# Altium PCB pcb.PcbDoc
Units mm, origin at the board's own origin, x right, y up, seen from the top; angles counter-clockwise.
Board outline 101 x 56 mm, 2 copper layers (Top Layer, Bottom Layer), stack 1.58 mm thick; 48 components, 39 nets, 217 pads, 0 vias.
Unrouted connection lines stored in the file: 108.
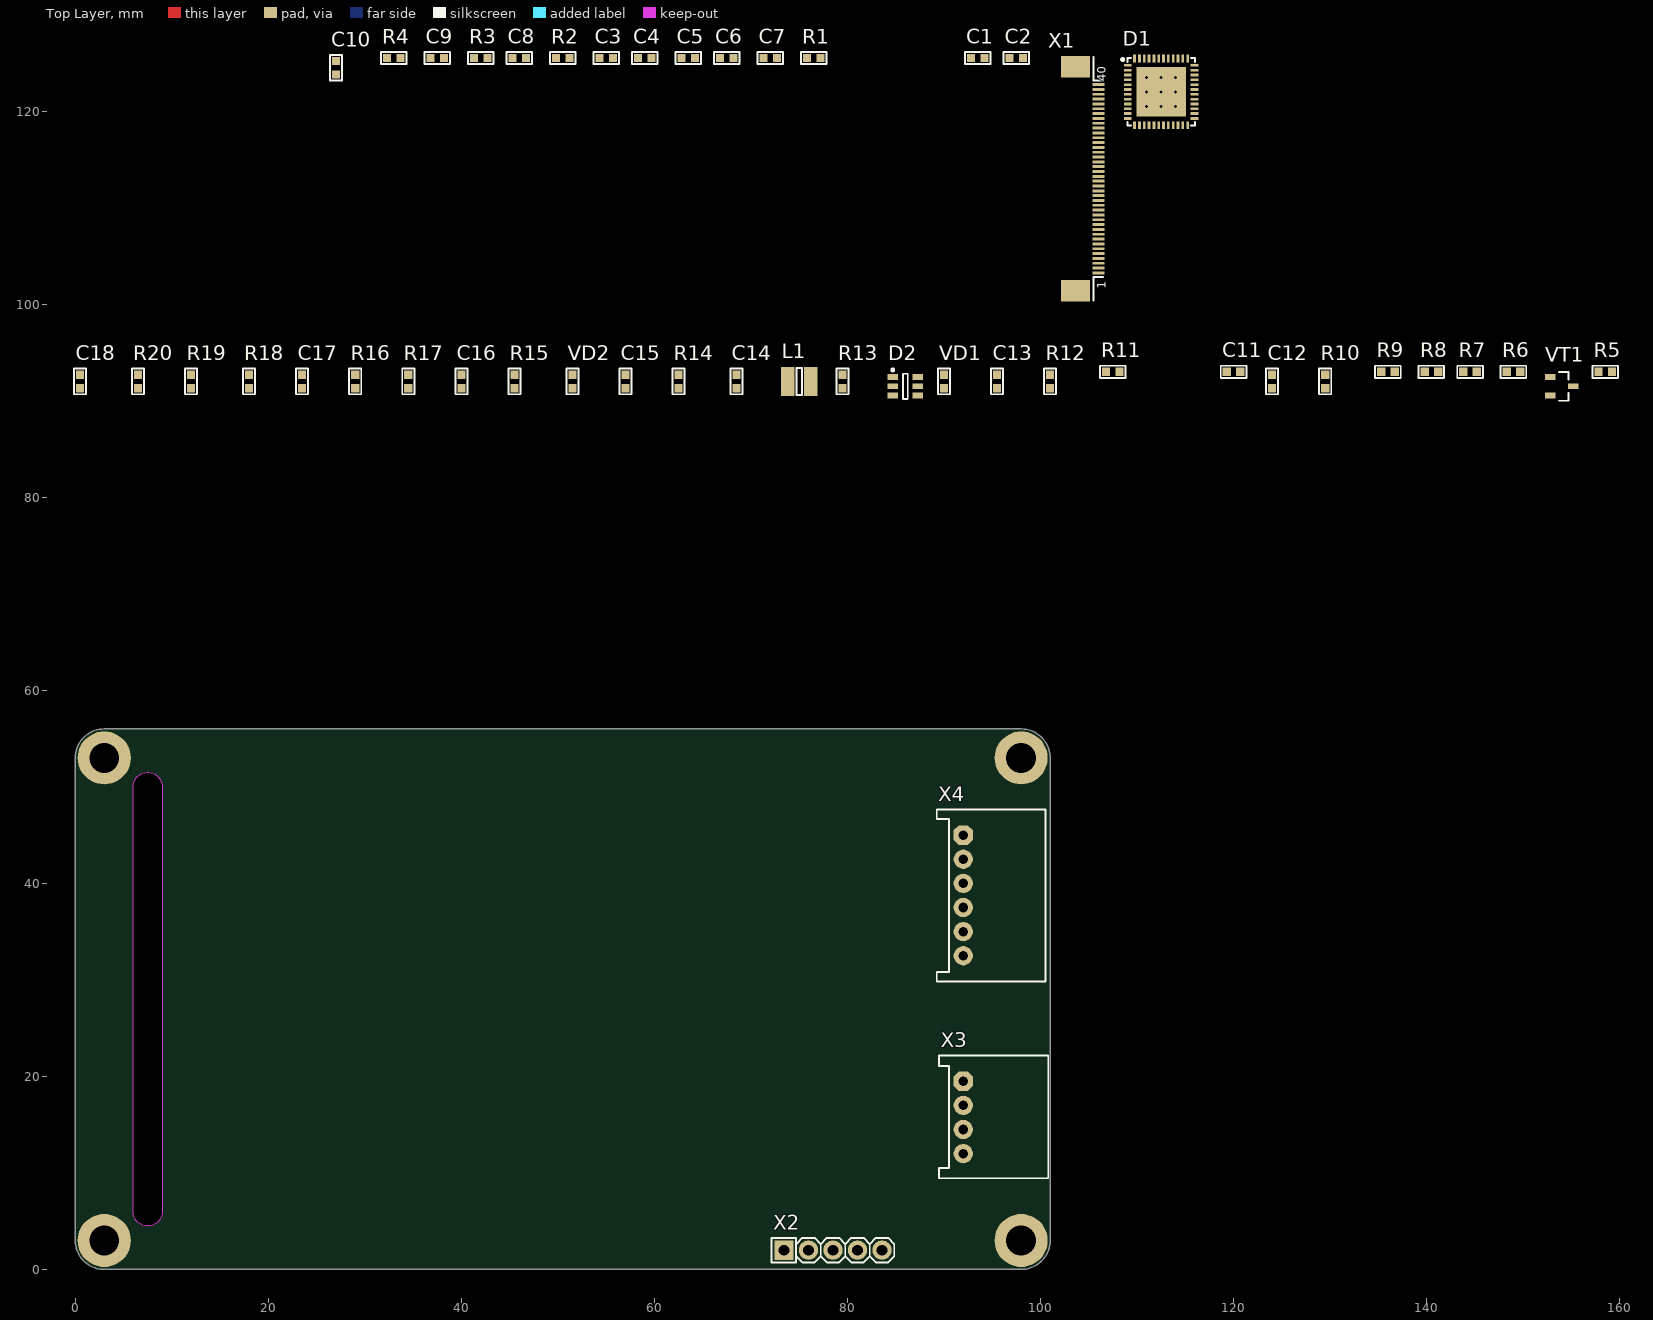
[diagram p0: Top Layer view]
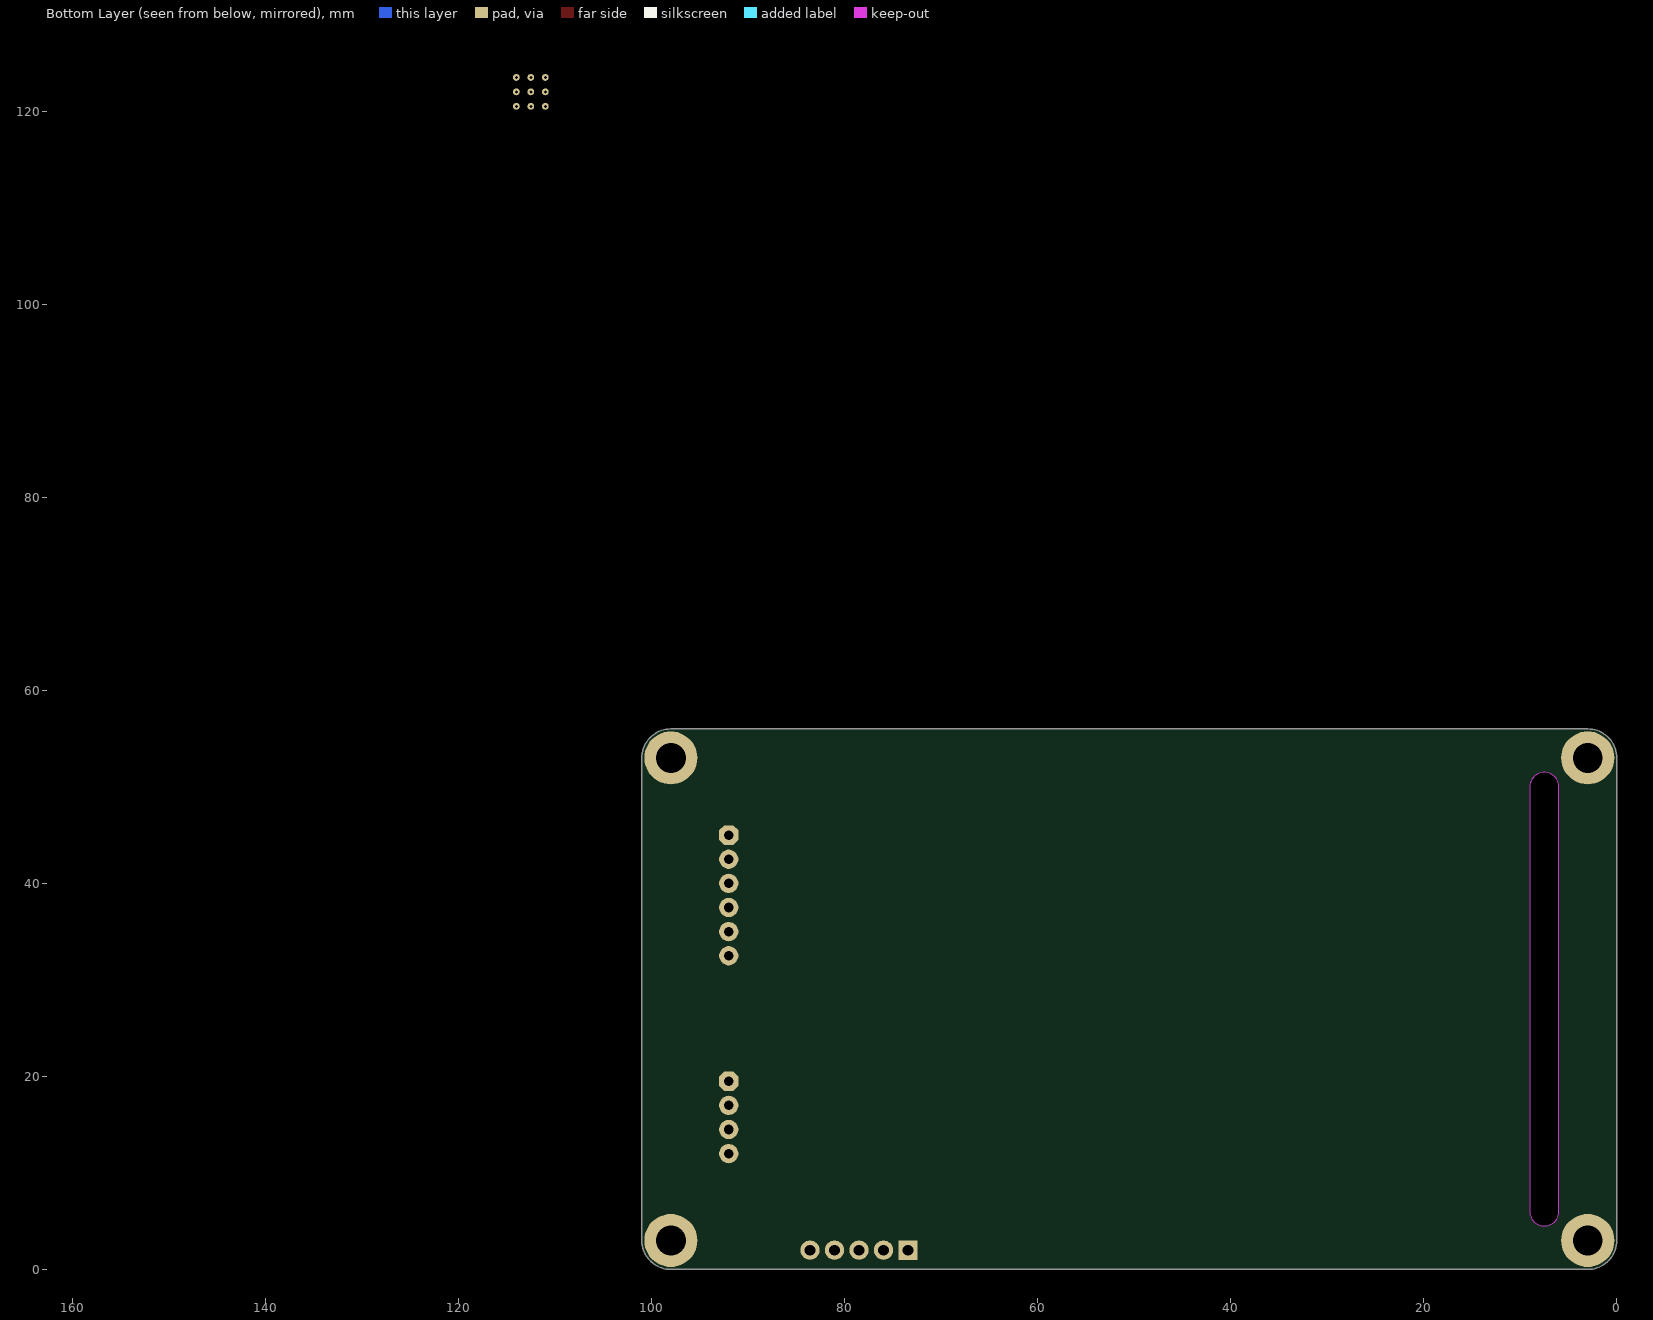
[diagram p1: Bottom Layer view, seen from below]

## Layer stack, top to bottom
Top Solder: solder mask 0.0102, Solder Resist, Dk 3.5
Top Layer: signal copper 0.0356
Dielectric 1: dielectric 1.509, FR-4, Dk 4.8
Bottom Layer: signal copper 0.0356
Bottom Solder: solder mask 0.0102, Solder Resist, Dk 3.5

## Board outline
0,3 0,53 cw(c3,53) 3,56 98,56 cw(c98,53) 101,53 101,3 cw(c98,3) 98,0 3,0 cw(c3,3)
cut-out: 6,6 6,50 cw(c7.5,50) 9,50 9,6 cw(c7.5,6)

## Design rules (kind name [scope] priority, off if disabled: settings)
BoardOutlineClearance [All] p1: gap=0.3 ignorepadtopadclearanceinfootprint=FALSE
Clearance Clearance_MultiLayerPad [OnLayer('Multi-Layer') and IsPad] p1: gap=0.3 ignorepadtopadclearanceinfootprint=FALSE except(0: Arc-Hole Track-Hole SMDPad-Hole THPad-Hole Via-Hole Fill-Hole Poly-Hole Region-Hole Text-Hole)
Clearance Clearance_Polygon [InPolygon] p2: gap=0.2 ignorepadtopadclearanceinfootprint=FALSE except(0: Arc-Hole Track-Hole SMDPad-Hole THPad-Hole Via-Hole Fill-Hole Poly-Hole Region-Hole Text-Hole; 0.3: Arc-Poly Arc-Region Track-Poly Track-Region SMDPad-Poly SMDPad-Region THPad-Poly THPad-Region Via-Poly Via-Region Fill-Poly Fill-Region Poly-Poly Poly-Region Region-Region)
Clearance [All] p3: gap=0.2 ignorepadtopadclearanceinfootprint=FALSE except(0: Arc-Hole Track-Hole SMDPad-Hole THPad-Hole Via-Hole Fill-Hole Poly-Hole Region-Hole Text-Hole)
ComponentClearance [All] p1: gap=0.5 collisioncheckmode=3 verticalgap=0.5 showdistances=FALSE
DiffPairsRouting [All] p1: maxlimit=0.4 minlimit=0.2 mostfreqgap=0.2 toplayer_minwidth=0.2 toplayer_maxwidth=0.3 toplayer_prefwidth=0.2 bottomlayer_minwidth=0.2 bottomlayer_maxwidth=0.3 bottomlayer_prefwidth=0.2 maxuncoupledlength=12.7
Height [All] p1: minheight=0 maxheight=50 prefheight=12.7
HoleSize [All] p1: absolutevalues=TRUE maxlimit=10 minlimit=0.2 maxpercent=80.000 minpercent=20.000
HoleToHoleClearance [All] p1: gap=0.3 allowstackedmicrovias=TRUE
MinimumSolderMaskSliver [All] p1: minsoldermaskwidth=0.05
PlaneClearance [All] p1: clearance=0.5
PlaneConnect [All] p1: planeconnectstyle=Relief reliefexpansion=0.5 reliefentries=4 reliefconductorwidth=0.5 reliefairgap=0.3
PolygonConnect PolygonConnect_PadGND [InNet('GND') and IsPad] p1: connectstyle=Relief reliefconductorwidth=0.5 reliefentries=4 polygonreliefangle="90 Angle" airgapwidth=0.3
PolygonConnect PolygonConnect_Via [IsVia] p2: connectstyle=Direct reliefconductorwidth=0.254 reliefentries=4 polygonreliefangle="90 Angle" airgapwidth=0.254
PolygonConnect [All] p3: connectstyle=Relief reliefconductorwidth=0.5 reliefentries=4 polygonreliefangle="90 Angle" airgapwidth=0.3
RoutingTopology [All] p1: topology=Vertical
RoutingVias [All] p1: holewidth=0.2 width=0.4 viastyle="Through Hole" minholewidth=0.2 minwidth=0.4 maxholewidth=0.5 maxwidth=1.2
SilkToSilkClearance [All] p1: silktosilkclearance=0.05
SilkToSolderMaskClearance [IsPad] p1: minsilkscreentomaskgap=0.05 clearancetoexposedcopper=TRUE
SolderMaskExpansion [All] p1: expansion=0.075 istentingtop=FALSE
Width [All] p1: maxlimit=10 minlimit=0.2 preferedwidth=0.2
19 further rules are at their usual default settings.

## Components (designator, comment, footprint, x,y, rotation, side; value= is the part's Value field where it differs from the comment)
C1 "Ceramic capacitor, 4.7μF, X7R, ±10%, 6.3V, 603, -55...+125°C" "CAP: 0603" 93.499,125.5 r0 top value=4.7μF
C2 "Ceramic capacitor, 0.1μF, X7R, ±10%, 50V, 603, -55...+125°C" "CAP: 0603" 97.499,125.5 r0 top value=0.1μF
C3 "Ceramic capacitor, 0.1μF, X7R, ±10%, 50V, 603, -55...+125°C" "CAP: 0603" 54.999,125.5 r0 top value=0.1μF
C4 "Ceramic capacitor, 0.1μF, X7R, ±10%, 50V, 603, -55...+125°C" "CAP: 0603" 58.999,125.5 r0 top value=0.1μF
C5 "Ceramic capacitor, 0.1μF, X7R, ±10%, 50V, 603, -55...+125°C" "CAP: 0603" 63.499,125.5 r0 top value=0.1μF
C6 "Ceramic capacitor, 0.1μF, X7R, ±10%, 50V, 603, -55...+125°C" "CAP: 0603" 67.499,125.5 r0 top value=0.1μF
C7 "Ceramic capacitor, 2.2μF, X7R, ±10%, 10V, 603, -55...+125°C" "CAP: 0603" 71.999,125.5 r0 top value=2.2μF
C8 "Ceramic capacitor, 0.1μF, X7R, ±10%, 50V, 603, -55...+125°C" "CAP: 0603" 45.999,125.5 r0 top value=0.1μF
C9 "Ceramic capacitor, 4.7μF, X7R, ±10%, 6.3V, 603, -55...+125°C" "CAP: 0603" 37.499,125.5 r0 top value=4.7μF
C10 "Ceramic capacitor, 4.7μF, X7R, ±10%, 6.3V, 603, -55...+125°C" "CAP: 0603" 26.999,124.5 r90 top value=4.7μF
C11 "Ceramic capacitor, 4.7μF, X7R, ±10%, 6.3V, 603, -55...+125°C" "CAP: 0603" 119.999,93 r0 top value=4.7μF
C12 "Ceramic capacitor, 4.7μF, X7R, ±10%, 6.3V, 603, -55...+125°C" "CAP: 0603" 123.999,92 r90 top value=4.7μF
C13 "Ceramic capacitor, 4.7μF, X7R, ±10%, 6.3V, 603, -55...+125°C" "CAP: 0603" 95.499,92 r90 top value=4.7μF
C14 "Ceramic capacitor, 0.1μF, X7R, ±10%, 50V, 603, -55...+125°C" "CAP: 0603" 68.499,92 r90 top value=0.1μF
C15 "Ceramic capacitor, 4.7μF, X7R, ±10%, 6.3V, 603, -55...+125°C" "CAP: 0603" 56.999,92 r90 top value=4.7μF
C16 "Ceramic capacitor, 4.7μF, X7R, ±10%, 6.3V, 603, -55...+125°C" "CAP: 0603" 39.999,92 r90 top value=4.7μF
C17 "Ceramic capacitor, 4.7μF, X7R, ±10%, 6.3V, 603, -55...+125°C" "CAP: 0603" 23.5,92 r90 top value=4.7μF
C18 "Ceramic capacitor, 4.7μF, X7R, ±10%, 6.3V, 603, -55...+125°C" "CAP: 0603" 0.5,92 r90 top value=4.7μF
D1 "IC microcontroller, 32-Bit, Cortex-M4, 84MHz, 256KB, 64KB, 1.7...3.6V, -40...+85°C, 48-UFQFPN (7x7)" "48-QFN (7x7)" 112.499,122 r0 top
D2 "DC/DC buck converter, input 3.8...32V, 500kHz, output 1.2...12V, 2A, -40...+85°C, SOT23-6" SOT23-6 85.999,91.5 r0 top
L1 "Fixed inductor, 4.7μH, ±20%, CD32 series, 1.5A, -40...+125°C" "IND: CD32" 74.999,92 r0 top value=4.7μH
R1 "Resistor film, 10k, ±5%, 603, 0.1W, -55...+125°C" "RES: 0603" 76.499,125.5 r0 top value=10k
R2 "Resistor film, 10k, ±5%, 603, 0.1W, -55...+125°C" "RES: 0603" 50.499,125.5 r0 top value=10k
R3 "Resistor film, 120R, ±5%, 603, 0.1W, -55...+125°C" "RES: 0603" 41.999,125.5 r0 top value=120R
R4 "Resistor film, 10k, ±5%, 603, 0.1W, -55...+125°C" "RES: 0603" 32.999,125.5 r0 top value=10k
R5 "Resistor film, 120R, ±5%, 603, 0.1W, -55...+125°C" "RES: 0603" 158.499,93 r0 top value=120R
R6 "Resistor film, 120R, ±5%, 603, 0.1W, -55...+125°C" "RES: 0603" 148.999,93 r0 top value=120R
R7 "Resistor film, 120R, ±5%, 603, 0.1W, -55...+125°C" "RES: 0603" 144.499,93 r0 top value=120R
R8 "Resistor film, 10k, ±5%, 603, 0.1W, -55...+125°C" "RES: 0603" 140.499,93 r0 top value=10k
R9 "Resistor film, 120R, ±5%, 603, 0.1W, -55...+125°C" "RES: 0603" 135.999,93 r0 top value=120R
R10 "Resistor film, 10k, ±5%, 603, 0.1W, -55...+125°C" "RES: 0603" 129.499,92 r90 top value=10k
R11 "Resistor film, 120R, ±5%, 603, 0.1W, -55...+125°C" "RES: 0603" 107.499,93 r0 top value=120R
R12 "Resistor film, 10k, ±5%, 603, 0.1W, -55...+125°C" "RES: 0603" 100.999,92 r90 top value=10k
R13 "Resistor film, 1k, ±1%, 603, 0.1W, -55...+125°C" "RES: 0603" 79.499,92 r90 top value=1k
R14 "Resistor film, 120R, ±5%, 603, 0.1W, -55...+125°C" "RES: 0603" 62.499,92 r90 top value=120R
R15 "Resistor film, 10k, ±5%, 603, 0.1W, -55...+125°C" "RES: 0603" 45.499,92 r90 top value=10k
R16 "Resistor film, 30k9, ±1%, 603, 0.1W, -55...+125°C" "RES: 0603" 28.999,92 r90 top value=30k9
R17 "Resistor film, 1k, ±1%, 603, 0.1W, -55...+125°C" "RES: 0603" 34.499,92 r90 top value=1k
R18 "Resistor film, 10k, ±1%, 603, 0.1W, -55...+125°C" "RES: 0603" 18,92 r90 top value=10k
R19 "Resistor film, 120R, ±5%, 603, 0.1W, -55...+125°C" "RES: 0603" 12,92 r90 top value=120R
R20 "Resistor film, 10k, ±5%, 603, 0.1W, -55...+125°C" "RES: 0603" 6.5,92 r90 top value=10k
VD1 "LED, 20mA, 2V, 603, -55...+150°C" "LED: 0603G" 89.999,92 r90 top
VD2 "LED, 20mA, 2V, 603, -55...+150°C" "LED: 0603Y" 51.499,92 r90 top
VT1 "MOSFET N-channel transistor, 30V, 5.3A, 2.6nC, 1.3W, 27mOhm, 382pF, SOT-23, -55...+150°C" SOT23 153.999,91.5 r0 top
X1 "Connector, 40pin, 0.5mm, FFC/FPC, Top contact" "CON: FFC/FPC-40-0.5" 105.999,113 r90 top
X2 "Connector, 5pin, 2.54mm, 500VAC, 3A" "CON: PLS-5" 78.5,2 r0 top
X3 "Connector, 4pin, 2.54mm, 250VAC, 3A" "CON: CWF-4R" 92,15.75 r270 top
X4 "Connector, 6pin, 2.54mm, 250VAC, 3A" "CON: CWF-6R" 92,38.75 r270 top

## Footprints (in the part's own frame and the unit in brackets; to place one, negate y for a bottom-side part, rotate by r counter-clockwise, add the part's x,y. Pads: shape width x height; smd on the part's side, far side on the other; paste and mask are expansions set on the pad)
"48-QFN (7x7)" [mm] "7x7 mm, pitch 0.5 mm, power pad"
  round 0.7 hole 0.3: 0(-1.5,-1.5) 0(-1.5,0) 0(-1.5,1.5) 0(0,-1.5) 0(0,0) 0(0,1.5) 0(1.5,-1.5) 0(1.5,0) 0(1.5,1.5)
  rect 5.15x5.15 smd mask+0.05: 0(0,0)
  rect 0.8x0.28 smd mask+0.05: 1(-3.45,2.75) 2(-3.45,2.25) 3(-3.45,1.75) 4(-3.45,1.25) 5(-3.45,0.75) 6(-3.45,0.25) 7(-3.45,-0.25) 8(-3.45,-0.75) 9(-3.45,-1.25) 10(-3.45,-1.75) 11(-3.45,-2.25) 12(-3.45,-2.75) 25(3.45,-2.75) 26(3.45,-2.25) 27(3.45,-1.75) 28(3.45,-1.25) 29(3.45,-0.75) 30(3.45,-0.25) 31(3.45,0.25) 32(3.45,0.75) 33(3.45,1.25) 34(3.45,1.75) 35(3.45,2.25) 36(3.45,2.75)
  rect 0.28x0.8 smd mask+0.05: 13(-2.75,-3.45) 14(-2.25,-3.45) 15(-1.75,-3.45) 16(-1.25,-3.45) 17(-0.75,-3.45) 18(-0.25,-3.45) 19(0.25,-3.45) 20(0.75,-3.45) 21(1.25,-3.45) 22(1.75,-3.45) 23(2.25,-3.45) 24(2.75,-3.45) 37(2.75,3.45) 38(2.25,3.45) 39(1.75,3.45) 40(1.25,3.45) 41(0.75,3.45) 42(0.25,3.45) 43(-0.25,3.45) 44(-0.75,3.45) 45(-1.25,3.45) 46(-1.75,3.45) 47(-2.25,3.45) 48(-2.75,3.45)
  round 0.5 on Mech1: ""(-3,3)
  silkscreen extent -4.12,-3.5 3.5,3.5, body extent -3.51,-3.51 3.51,3.51, height 0.78
"CAP: 0603" [mm]
  rect 0.85x0.85 smd: 1(-0.7,0) 2(0.7,0)
  silkscreen extent -1.33,-0.63 1.33,0.63, body extent -0.8,-0.4 0.8,0.4, height 0.3
"CON: CWF-4R" [mm]
  oct 2x2 hole 1: 1(-3.75,0)
  round 2 hole 1: 2(-1.25,0) 3(1.25,0) 4(3.75,0)
  round 0.5 on Mech1: ""(-5.8,-1.9)
  round 0.5 on Top Overlay: ""(-5,-1)
  silkscreen extent -6.4,-2.5 6.3,8.8, body extent -6.25,-2.35 6.15,9.15, height 5.8
"CON: CWF-6R" [mm]
  oct 2x2 hole 1: 1(-6.25,0)
  round 2 hole 1: 2(-3.75,0) 3(-1.25,0) 4(1.25,0) 5(3.75,0) 6(6.25,0)
  round 0.5 on Mech1: ""(-8.2,-2.1)
  round 0.5 on Top Overlay: ""(-7.5,-1)
  silkscreen extent -8.9,-2.75 8.9,8.5, body extent -8.75,-2.6 8.75,8.9, height 5.85
"CON: FFC/FPC-40-0.5" [mm]
  rect 0.3x1.25 smd mask+0.075: 1(-9.75,0) 2(-9.25,0) 3(-8.75,0) 4(-8.25,0) 5(-7.75,0) 6(-7.25,0) 7(-6.75,0) 8(-6.25,0) 9(-5.75,0) 10(-5.25,0) 11(-4.75,0) 12(-4.25,0) 13(-3.75,0) 14(-3.25,0) 15(-2.75,0) 16(-2.25,0) 17(-1.75,0) 18(-1.25,0) 19(-0.75,0) 20(-0.25,0) 21(0.25,0) 22(0.75,0) 23(1.25,0) 24(1.75,0) 25(2.25,0) 26(2.75,0) 27(3.25,0) 28(3.75,0) 29(4.25,0) 30(4.75,0) 31(5.25,0) 32(5.75,0) 33(6.25,0) 34(6.75,0) 35(7.25,0) 36(7.75,0) 37(8.25,0) 38(8.75,0) 39(9.25,0) 40(9.75,0)
  rect 2.2x3 smd mask+0.075: MH(-11.6,2.375) MH(11.6,2.375)
  silkscreen extent -12.6,-0.5 12.6,0.5, body extent -12.75,0 12.75,5.4, height 2.07
"CON: PLS-5" [mm]
  rect 2x2 hole 1.1: 1(-5.08,0)
  round 2 hole 1.1: 2(-2.54,0) 3(0,0) 4(2.54,0) 5(5.08,0)
  silkscreen extent -6.35,-1.27 6.35,1.27, body extent -6.35,-1.27 6.35,1.27, height 8.54
"IND: CD32" [mm]
  rect 1.4x3 smd mask+0.075: 1(-1.2,0) 2(1.2,0)
  silkscreen extent -0.3,-1.4 0.3,1.4, body extent -1.68,-1.5 1.68,1.5, height 2.1
"LED: 0603G" [mm]
  rect 0.85x0.85 smd: 1(-0.7,0) 2(0.7,0)
  silkscreen extent -1.33,-0.63 1.33,0.63, body extent -0.8,-0.4 0.8,0.4, height 0.6
"LED: 0603Y" [mm]
  rect 0.85x0.85 smd: 1(-0.7,0) 2(0.7,0)
  silkscreen extent -1.33,-0.63 1.33,0.63, body extent -0.8,-0.4 0.8,0.4, height 0.6
"RES: 0603" [mm]
  rect 0.85x0.85 smd: 1(-0.7,0) 2(0.7,0)
  silkscreen extent -1.33,-0.63 1.33,0.63, body extent -0.8,-0.4 0.8,0.4, height 0.44
SOT23 [mm]
  rect 1.1x0.6 smd: 1(-1.2,0.95) 2(-1.2,-0.95) 3(1.2,0)
  round 0.5 on Mech1: ""(-0.9,1.1)
  silkscreen extent -0.3,-1.5 0.7,1.5, body extent -1.32,-1.52 1.32,1.52, height 1.12
SOT23-6 [mm] "pitch 0.95 mm"
  rect 1.1x0.6 smd: 1(-1.3,0.95) 2(-1.3,0) 3(-1.3,-0.95) 4(1.3,-0.95) 5(1.3,0) 6(1.3,0.95)
  round 0.5 on Mech1: ""(-1,1.1)
  silkscreen extent -1.42,-1.3 0.25,1.82, body extent -1.4,-1.45 1.4,1.45, height 1.45

## Part data
C1 C9 C10 C11 C12 C13 C15 C16 C17 C18: library part Ceramic_0603, Manufacturer=Samsung, Package=0603, PartNumber=CL10B475KQ8NQNC, Temperature=-55...+125°C, Tolerance=±10%, TypeCapacitor="Ceramic capacitor", TypeDielectric=X7R, Voltage=6.3V, HelpURL=https://www.digikey.com/en/products/detail/samsung-electro-mechanics/CL10B475KQ8NQNC/3887745, ValueManufacturerPartNumber="Ceramic capacitor, 4.7μF, X7R, ±10%, 6.3V, 603, -55...+125°C"
C2 C3 C4 C5 C6 C8 C14: library part Ceramic_0603, Manufacturer=Yageo, Package=0603, PartNumber=CL10B104KB8WPND, Temperature=-55...+125°C, Tolerance=±10%, TypeCapacitor="Ceramic capacitor", TypeDielectric=X7R, Voltage=50V, HelpURL=https://www.digikey.com/product-detail/en/samsung-electro-mechanics/CL10B104KB8WPND/1276-CL10B104KB8WPNDCT-ND/11488014, ValueManufacturerPartNumber="Ceramic capacitor, 0.1μF, X7R, ±10%, 50V, 603, -55...+125°C"
C7: library part Ceramic_0603, Manufacturer=Yageo, Package=0603, PartNumber=CL10B225KP8NFNC, Temperature=-55...+125°C, Tolerance=±10%, TypeCapacitor="Ceramic capacitor", TypeDielectric=X7R, Voltage=10V, HelpURL=https://www.digikey.com/product-detail/en/samsung-electro-mechanics/CL10B225KP8NFNC/1276-2016-1-ND/3890102, ValueManufacturerPartNumber="Ceramic capacitor, 2.2μF, X7R, ±10%, 10V, 603, -55...+125°C"
D1: library part STM32F401CCU6, "Cortex-M4", Manufacturer=STMicroelectronics, Package="48-UFQFPN (7x7)", Temperature=-40...+85°C, ComponentType="IC microcontroller", CoreProcessor=Cortex-M4, CoreSize=32-Bit, HelpURL=https://www.digikey.com/en/products/detail/stmicroelectronics/STM32F401CCU6/4755971, MemoryRAM=64KB, MemoryROM=256KB, PartNumber=STM32F401CCU6, Speed=84MHz, Supply=1.7...3.6V, ValueManufacturerPartNumber="IC microcontroller, 32-Bit, Cortex-M4, 84MHz, 256KB, 64KB, 1.7...3.6V, -40...+85°C, 48-UFQFPN (7x7)"
D2: library part AP63200WU-7, "Buck converter", CurrentOutput=2A, Frequency=500kHz, Manufacturer=Diodes, Package=SOT23-6, Temperature=-40...+85°C, VoltageInput="input 3.8...32V", VoltageOutput="output 1.2...12V", ComponentType="DC/DC buck converter", HelpURL=https://www.digikey.com/en/products/detail/diodes-incorporated/AP63200WU-7/9858423, PartNumber=AP63200WU-7, ValueManufacturerPartNumber="DC/DC buck converter, input 3.8...32V, 500kHz, output 1.2...12V, 2A, -40...+85°C, SOT23-6"
L1: library part Inductor_CD32, Manufacturer=YJYCOIN, MaxCurrent=1.5A, Package="CD32 series", PartNumber=CD32YP0302-4R7M, Temperature=-40...+125°C, Tolerance=±20%, TypeInductor="Fixed inductor", HelpURL=https://lcsc.com/product-detail/New-Arrivals_YJYCOIN-CD32YP0302-4R7M_C492259.html, ValueManufacturerPartNumber="Fixed inductor, 4.7μH, ±20%, CD32 series, 1.5A, -40...+125°C"
R1 R2 R4 R8 R10 R12 R15 R20: library part Resistor_0603, Manufacturer=Yageo, Package=0603, PartNumber=RC0603JR-0710KL, Power=0.1W, Temperature=-55...+125°C, Tolerance=±5%, TypeResistor="Resistor film", HelpURL=https://www.digikey.com/product-detail/en/yageo/RC0603JR-0710KL/311-10KGRCT-ND/729647, ValueManufacturerPartNumber="Resistor film, 10k, ±5%, 603, 0.1W, -55...+125°C"
R3 R5 R6 R7 R9 R11 R14 R19: library part Resistor_0603, Manufacturer=Yageo, Package=0603, PartNumber=RC0603JR-07120RL, Power=0.1W, Temperature=-55...+125°C, Tolerance=±5%, TypeResistor="Resistor film", HelpURL=https://www.digikey.com/product-detail/en/yageo/RC0603JR-07120RL/311-120GRCT-ND/729653, ValueManufacturerPartNumber="Resistor film, 120R, ±5%, 603, 0.1W, -55...+125°C"
R13 R17: library part Resistor_0603, Manufacturer=Yageo, Package=0603, PartNumber=RC0603JR-071KL, Power=0.1W, Temperature=-55...+125°C, Tolerance=±1%, TypeResistor="Resistor film", HelpURL=https://www.digikey.com/en/products/detail/yageo/RC0603JR-071KL/726677?s=N4IgTCBcDaIEoGEAMA2JBmAUnAtEg7AIwDSAMiALoC%2BQA, ValueManufacturerPartNumber="Resistor film, 1k, ±1%, 603, 0.1W, -55...+125°C"
R16: library part Resistor_0603, Manufacturer=Yageo, Package=0603, PartNumber=RC0603FR-0730K9L, Power=0.1W, Temperature=-55...+125°C, Tolerance=±1%, TypeResistor="Resistor film", HelpURL=https://www.digikey.com/en/products/detail/yageo/RC0603FR-0730K9L/727144, ValueManufacturerPartNumber="Resistor film, 30k9, ±1%, 603, 0.1W, -55...+125°C"
R18: library part Resistor_0603, Manufacturer=Yageo, Package=0603, PartNumber=AC0603FR-0710KL, Power=0.1W, Temperature=-55...+125°C, Tolerance=±1%, TypeResistor="Resistor film", HelpURL=https://www.digikey.com/en/products/detail/yageo/AC0603FR-0710KL/2827814, ValueManufacturerPartNumber="Resistor film, 10k, ±1%, 603, 0.1W, -55...+125°C"
VD1: library part LED_single, Color=GREEN, Current=20mA, Manufacturer=Wurth, Package=0603, PartNumber=150060VS75000, Temperature=-55...+150°C, VoltageDrop=2V, HelpURL=https://www.digikey.com/product-detail/en/w-rth-elektronik/150060VS75000/732-4980-1-ND/4489904, TypeDiode=LED, ValueManufacturerPartNumber="LED, 20mA, 2V, 603, -55...+150°C"
VD2: library part LED_single, Color=YELLOW, Current=20mA, Manufacturer=Wurth, Package=0603, PartNumber=150060YS75000, Temperature=-55...+150°C, VoltageDrop=2V, HelpURL=https://www.digikey.com/product-detail/en/wurth-electronics-inc/150060YS75000/732-4981-1-ND/4489907, TypeDiode=LED, ValueManufacturerPartNumber="LED, 20mA, 2V, 603, -55...+150°C"
VT1: library part MOSFET_N_132, CurrentDS=5.3A, InputCapacitor=382pF, Manufacturer="Infineon Technologies", MaxPower=1.3W, Package=SOT-23, PartNumber=IRLML0030TRPBF, Temperature=-55...+150°C, VoltageDS=30V, GateCharge=2.6nC, HelpURL=https://www.digikey.com/en/products/detail/infineon-technologies/IRLML0030TRPBF/2202215?s=N4IgTCBcDaIJICUAyBZJAGdBmdIC6AvkA, RDS=27mOhm, TypeTransistor="MOSFET N-channel transistor", ValueManufacturerPartNumber="MOSFET N-channel transistor, 30V, 5.3A, 2.6nC, 1.3W, 27mOhm, 382pF, SOT-23, -55...+150°C"
X1: library part Connector_FFC_40, CurrentMax="Top contact", Manufacturer=JUSHUO, PartNumber=AFC07-S40ECC-00, VoltageMax=FFC/FPC, CommentText="\"TFT ILI9488\"", HelpURL=https://lcsc.com/product-detail/FFC-FPC-Connectors_JUSHUO-AFC07-S40ECC-00_C11097.html, Multichannel=40pin, Pitch=0.5mm, TypeConnector=Connector, ValueManufacturerPartNumber="Connector, 40pin, 0.5mm, FFC/FPC, Top contact"
X2: library part PLS-5, CurrentMax=3A, Manufacturer=Connfly, VoltageMax=500VAC, CommentText="\"Debug\"", HelpURL=https://www.chipdip.ru/product/pls-5, Multichannel=5pin, PartNumber=PLS-5, Pitch=2.54mm, TypeConnector=Connector, ValueManufacturerPartNumber="Connector, 5pin, 2.54mm, 500VAC, 3A"
X3: library part CWF-4, CurrentMax=3A, Manufacturer=Connfly, PartNumber=CWF-4R, VoltageMax=250VAC, CommentText="\"Display\"", HelpURL=https://www.chipdip.ru/product/cwf-4r-ds1069-4-mr, Multichannel=4pin, Pitch=2.54mm, TypeConnector=Connector, ValueManufacturerPartNumber="Connector, 4pin, 2.54mm, 250VAC, 3A"
X4: library part CWF-6, CurrentMax=3A, Manufacturer=Connfly, PartNumber=CWF-6R, VoltageMax=250VAC, CommentText="\"Keyboard\"", HelpURL=https://www.chipdip.ru/product/cwf-6r-ds1069-6-mr, Multichannel=6pin, Pitch=2.54mm, TypeConnector=Connector, ValueManufacturerPartNumber="Connector, 6pin, 2.54mm, 250VAC, 3A"

## Free pads (board coordinates)
  round 5.5 hole 3.1 mask+0.075: MH(3,3) MH(3,53) MH(98,3) MH(98,53)

## Nets (pads, with @x,y where several pads share a name; then routed paths per layer and width w, separated by ;. In a path a pad name is that pad's centre, name@x,y a point inside that pad or via, vN(x,y) a via of type N, cw(c..) or ccw(c..) an arc to the next point about the centre after c; other vN are vias at no path point)
+3.3V: C1.2 C2.2 C3.2 C4.2 C5.2 C6.2 C9.2 C17.2 D1.1 D1.9 D1.24 D1.36 D1.48 L1.1 R1.2 R4.1 R10.1 R12.1 R15.1 R16.1 R20.1 X1.6 X1.7 X1.33 X1.38 X1.39 X1.40 X2.1
+5V: C11.2 C15.2 D2.2 D2.3 X3.1
GND: C1.1 C2.1 C3.1 C4.1 C5.1 C6.1 C7.1 C8.1 C9.1 C10.1 C11.1 C12.1 C13.1 C15.1 C16.1 C17.1 C18.1 D1.8 D1.23 D1.35 D1.47 D2.4 R2.1 R8.1 R18.1 VD1.2 VD2.2 VT1.2 X1.5 X1.16 X1.37 X2.5 X3.4 X4.6
KEY-DOWN: C12.2 R7.1
KEY-LEFT: C16.2 R14.1
KEY-OK: C13.2 R11.1
KEY-RIGHT: C18.2 R19.1
KEY-UP: C10.2 R3.1
LED-ENABLE: R13.2
LED-TX-DATA: R17.2
NetC7_2: C7.2 D1.22
NetC8_2: C8.2 D1.7 R1.1
NetC14_1: C14.1 D2.6
NetC14_2: C14.2 D2.5 L1.2
NetD1_44: D1.44 R2.2
NetD2_1: D2.1 R16.2 R18.2
NetR3_2: R3.2 R4.2 X4.1
NetR5_2: R5.2 R8.2 VT1.1
NetR6_1: R6.1 X3.2
NetR7_2: R7.2 R10.2 X4.2
NetR9_1: R9.1 X3.3
NetR11_2: R11.2 R12.2 X4.3
NetR13_1: R13.1 VD1.1
NetR14_2: R14.2 R15.2 X4.4
NetR17_1: R17.1 VD2.1
NetR19_2: R19.2 R20.2 X4.5
NetVT1_3: VT1.3 X1.34 X1.35 X1.36
SPI1-CLK: D1.15 X1.11
SPI1-CS: D1.14 X1.9
SPI1-MISO: D1.16 X1.14
SPI1-MOSI: D1.17 X1.13
SWCLK: D1.37 X2.3
SWDIO: D1.34 X2.2
SWO: D1.39 X2.4
TFT-D/C: D1.13 X1.10
TFT-PWM-LED: R5.1
TFT-RESET: D1.12 X1.15
UART1-RX: D1.31 R9.2
UART1-TX: D1.30 R6.2
pads on no net: D1. D1.0 D1.2 D1.3 D1.4 D1.5 D1.6 D1.10 D1.11 D1.18 D1.19 D1.20 D1.21 D1.25 D1.26 D1.27 D1.28 D1.29 D1.32 D1.33 D1.38 D1.40 D1.41 D1.42 D1.43 D1.45 D1.46 D2. VT1. X1.1 X1.2 X1.3 X1.4 X1.8 X1.12 X1.17 X1.18 X1.19 X1.20 X1.21 X1.22 X1.23 X1.24 X1.25 X1.26 X1.27 X1.28 X1.29 X1.30 X1.31 X1.32 X1.MH X3. X4.

## Silkscreen, mask and mechanical layers (free items; w line width, h text height)
Border:
  lines w0.2: 0,3 ccw(c3,3) 3,0 98,0 ccw(c98,3) 101,3 101,53 ccw(c98,53) 98,56 3,56 ccw(c3,53) 0,53 0,3 ; 6,6 ccw(c7.5,6) 9,6 9,50 ccw(c7.5,50) 6,50 6,6
Area:
  lines w0.2: 8,0.75 93,0.75 93,55.25 8,55.25 8,0.75

## Text inside footprints (layer, text, board x,y; h text height)
X1: Top Overlay "1" at 107.094,101.582 h1.5 r90; Top Overlay "40" at 107.094,123.087 h1.5 r90